# Altium PCB Stack PCB_Altium.pcbdoc
Units mm, origin at the board's own origin, x right, y up, seen from the top; angles counter-clockwise.
Board outline 151.01 x 116.33 mm, 2 copper layers (Top Layer, Bottom Layer); 39 components, 89 nets, 239 pads, 49 vias.
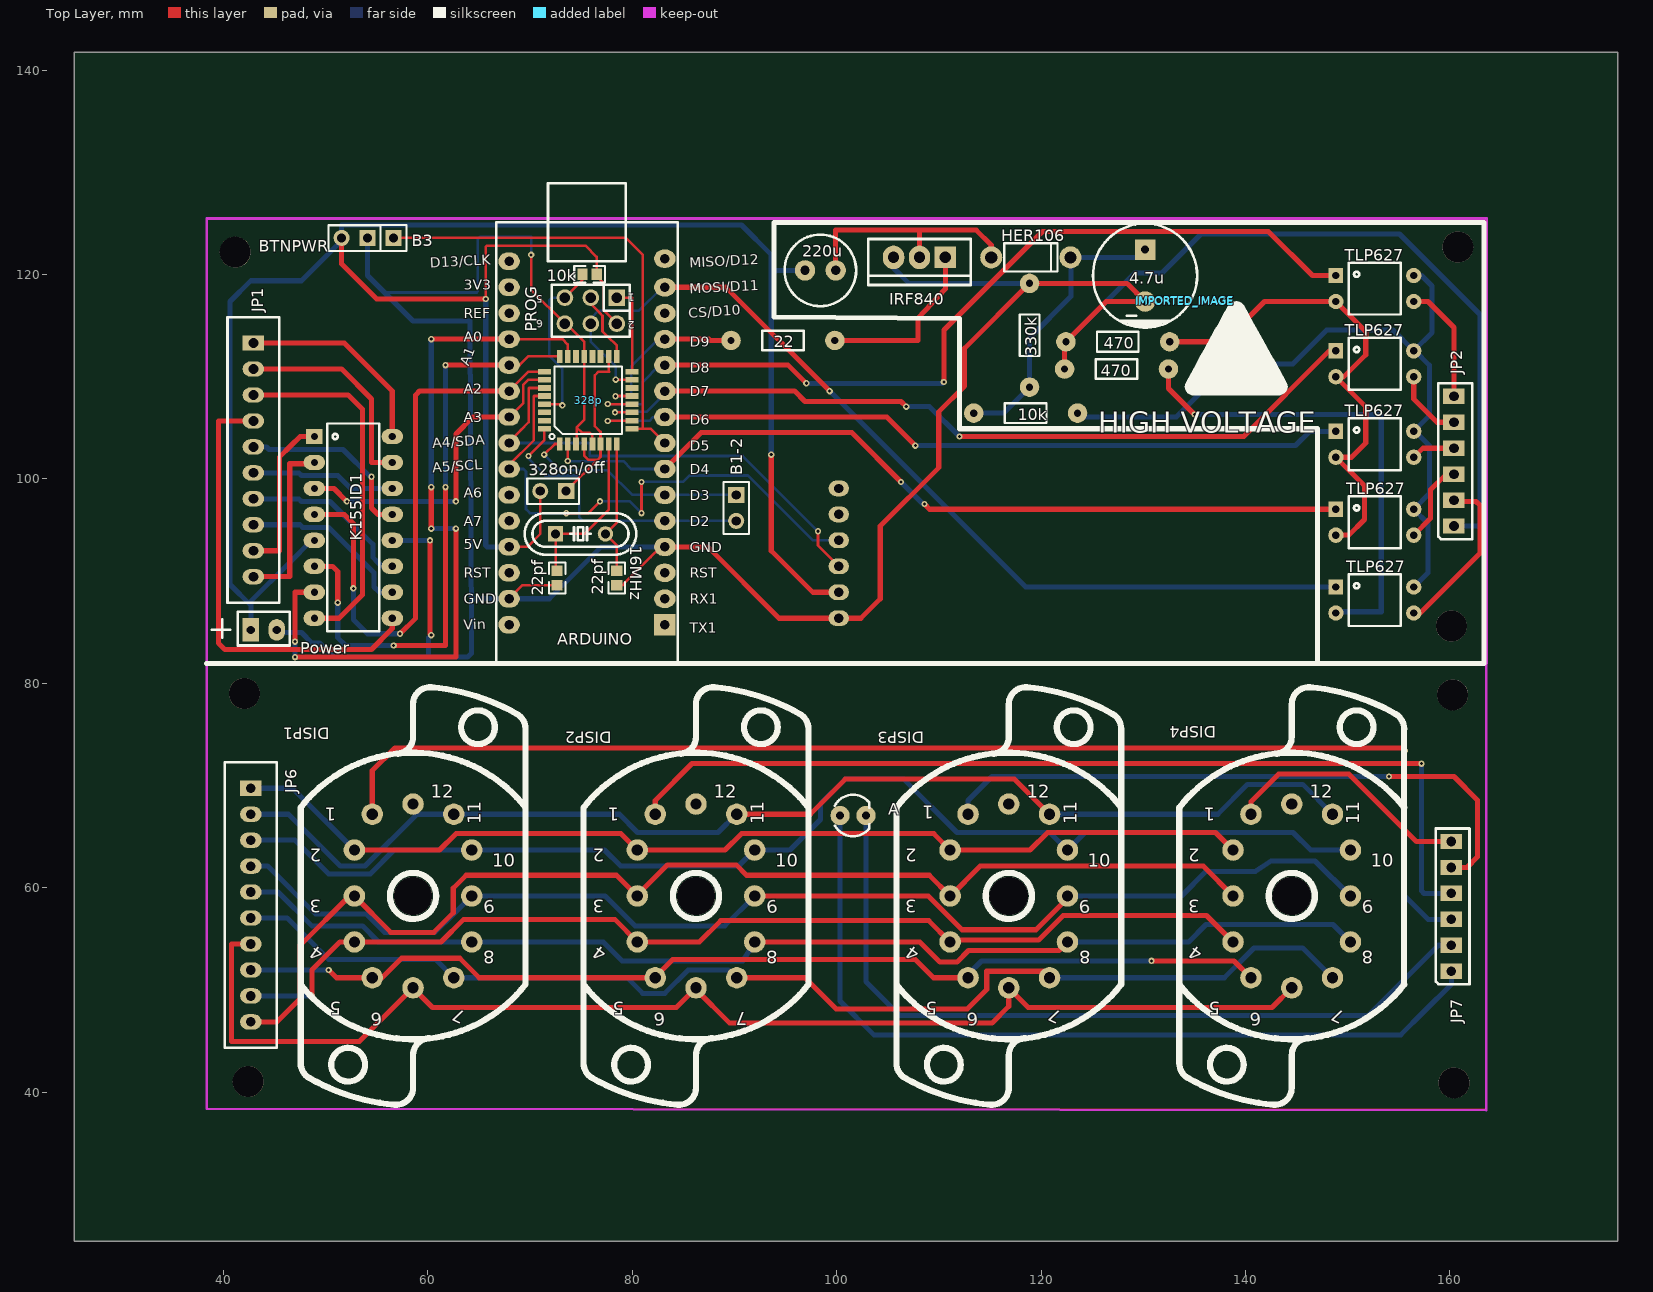
[diagram p0: Top Layer view]
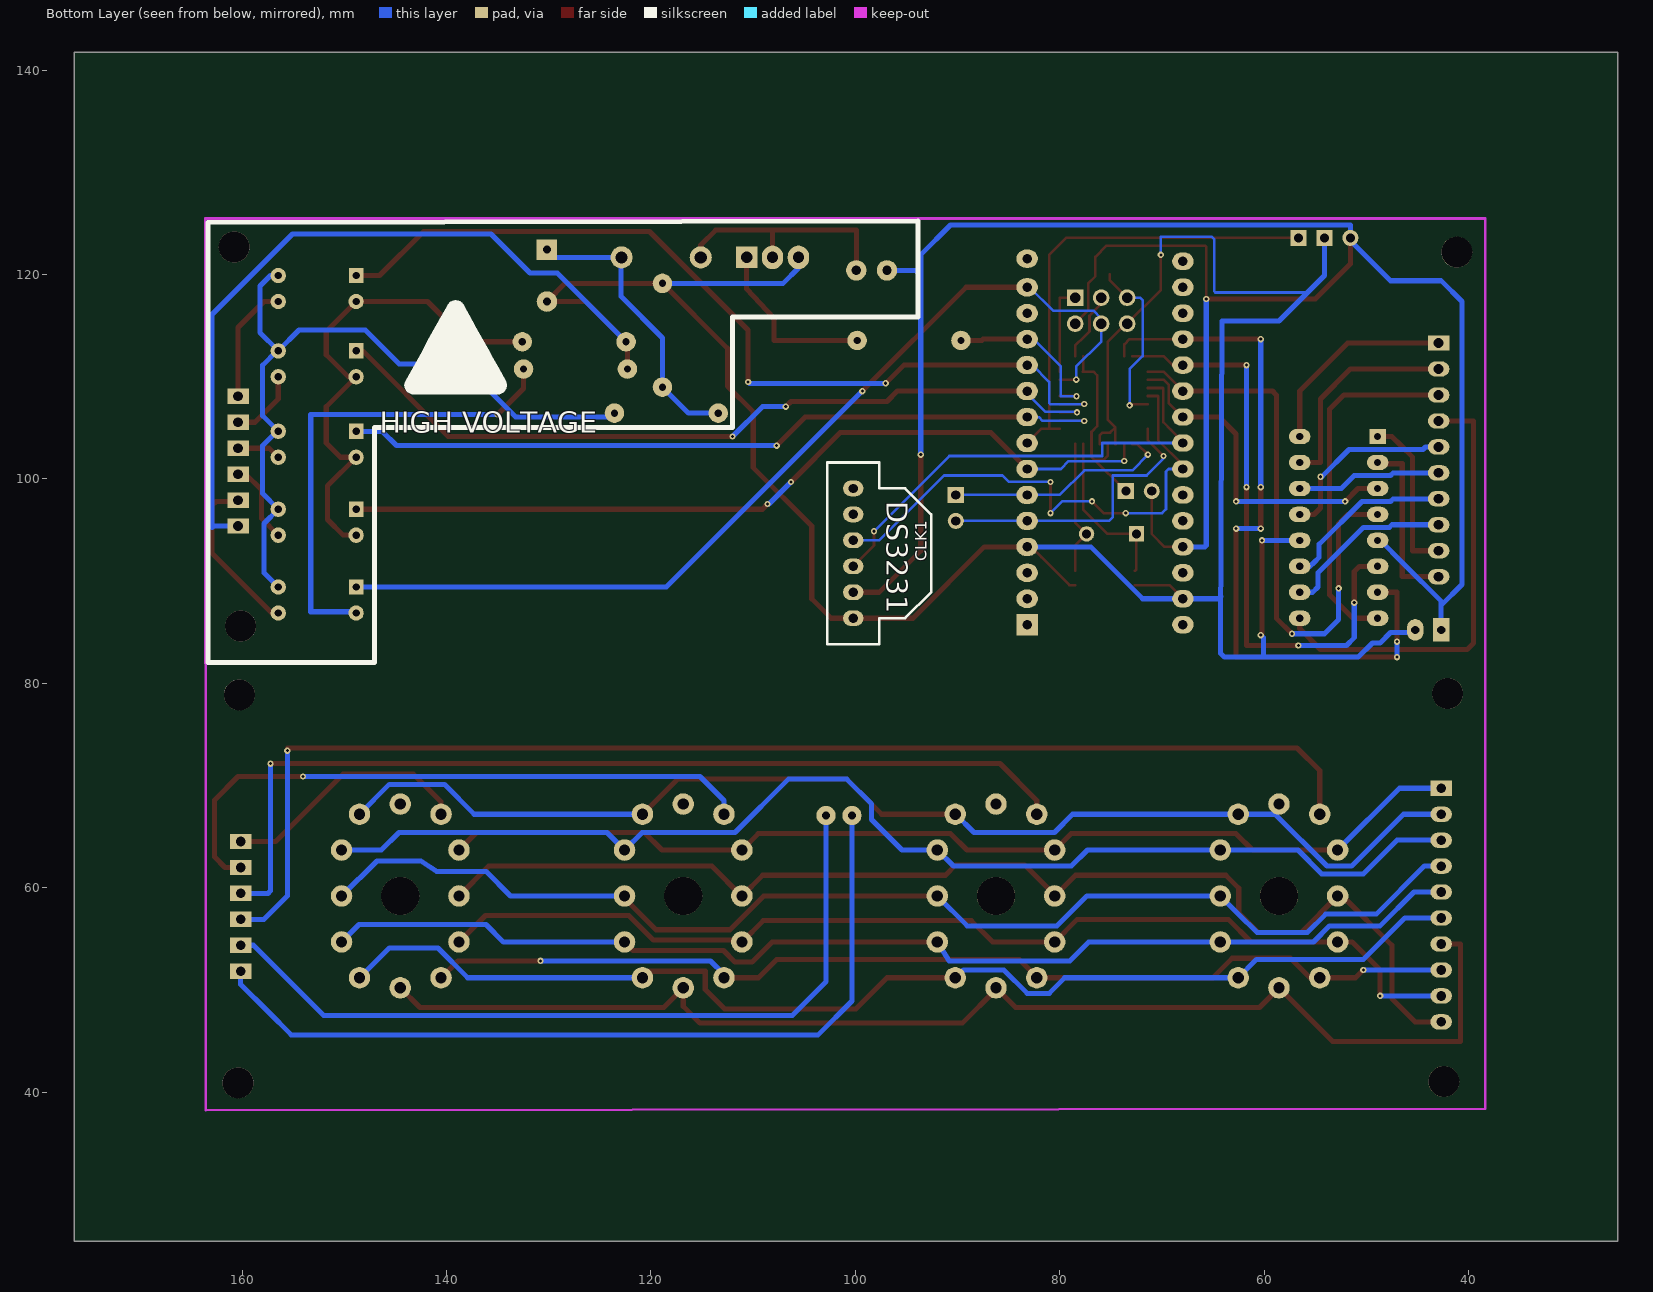
[diagram p1: Bottom Layer view, seen from below]

## Layer stack, top to bottom
Top Layer: signal copper (thickness not stored)
Dielectric: dielectric 0.32, FR-4, Dk 4.8
Bottom Layer: signal copper (thickness not stored)

## Board outline
176.414,25.4 25.4,25.4 25.4,141.732 176.414,141.732

## Components (designator, comment, footprint, x,y, rotation, side; value= is the part's Value field where it differs from the comment)
4.7u "4.7u 350В" CP_10X13MM 130.171,119.888 r180 top
10k "10k" RC06 118.487,106.426 r180 top
10k "10K" 0603 75.815,120.015 r0 top
16MHz "16MHz" HC-49S 74.926,94.615 r0 top
22 "22" RC06 94.738,113.538 r0 top
22pf "22pF" 0603 72.64,90.297 r90 top
22pf "22pF" 0603 78.482,90.297 r90 top
220u "220µ" RLB0712 96.897,120.396 r0 top
328on/off "ON/OFF micro" HDR-1X2/2.54 72.259,98.806 r180 top
328p "328p" TQFP32 75.688,107.696 r90 top
330k "330k" RC06 118.868,114.046 r270 top
470 "470" RC06 127.504,113.411 r0 top
470 "470" RC06 127.377,110.744 r0 top
A "Hologen" LED3MM 101.596,67.056 r0 top
ARDUINO "ARDUINO-NANO-V3.0" "ARDUINO_NANO V3" 75.561,103.505 r180 top
B1-2 "Signal 1-2" HDR-1X2/2.54 90.166,97.155 r270 top
B3 "Signal 3" HDR-1X1/2.54 56.638,123.571 r0 top
BTNPWR "BTN pwr" HDR-1X2/2.54 52.828,123.571 r180 top
CLK1 "DS3231" DS3231 100.199,93.98 r90 bottom
DISP1 "DISP_IN12A" DISP_IN-12_SOCKET_M 58.543,59.182 r0 top
DISP2 "DISP_IN12A" DISP_IN-12_SOCKET_M 86.229,59.182 r0 top
DISP3 "DISP_IN12A" DISP_IN-12_SOCKET_M 116.836,59.182 r0 top
DISP4 "DISP_IN12A" DISP_IN-12_SOCKET_M 144.522,59.182 r0 top
HER106 "HER106" DO-41 118.995,121.666 r0 top
IMPORTED_IMAGE "IMPORTED_IMAGE" IMPORTED_IMAGE 134.058,117.37 r0 top
IMPORTED_IMAGE "IMPORTED_IMAGE" IMPORTED_IMAGE 134.088,117.467 r0 top
IRF840 "IRF840" TO-220_MOD 108.327,121.412 r180 top
JP1 "10PIN" B10B_MOD 42.922,103.124 r90 top
JP2 "6PIN" 6PIN 160.397,101.727 r270 top
JP6 "10PIN" B10B_MOD 42.668,59.563 r90 top
JP7 "6PIN" 6PIN 160.143,58.166 r270 top
K155ID1 "К155ИД1" DIP16_MOD 48.891,104.14 r270 top
Power "Power" 2PIN_MOD 49.018,85.217 r0 top
PROG "PROG" HEADER_PRG_2X03 75.942,116.459 r180 top
TLP627 "TLP627" DIP4_MOD 148.84,119.888 r270 top
TLP627 "TLP627" DIP4_MOD 148.84,112.522 r270 top
TLP627 "TLP627" DIP4_MOD 148.84,104.648 r270 top
TLP627 "TLP627" DIP4_MOD 148.84,97.028 r270 top
TLP627 "TLP627" DIP4_MOD 148.84,89.408 r270 top

## Footprints (in the part's own frame and the unit in brackets; to place one, negate y for a bottom-side part, rotate by r counter-clockwise, add the part's x,y. Pads: shape width x height; smd on the part's side, far side on the other; paste and mask are expansions set on the pad)
2PIN_MOD [mm]
  rect 1.6x2.3 hole 0.798: 1(-6.35,0)
  oval 1.6x2.1 hole 0.798: 2(-3.81,0)
  silkscreen extent -10.16,-1.52 -2.54,1.78
6PIN [mm]
  rect 1.5x2.1 hole 0.95: 1(-6.35,0) 2(-3.81,0) 3(-1.27,0) 4(1.27,0) 5(3.81,0) 6(6.35,0)
  silkscreen extent -7.62,-1.52 7.62,1.78
0603 [mm]
  rect 1x1.1 smd: 1(-0.7,0) 2(0.7,0)
  silkscreen extent -1.5,-0.8 1.5,0.8
"ARDUINO_NANO V3" [mm]
  rect 2.1x2.1 hole 0.914: 1(-7.62,17.78)
  oval 2.1x1.778 hole 0.914: 2(-7.62,15.24) 3(-7.62,12.7) 4(-7.62,10.16) 5(-7.62,7.62) 6(-7.62,5.08) 7(-7.62,2.54) 8(-7.62,0) 9(-7.62,-2.54) 10(-7.62,-5.08) 11(-7.62,-7.62) 12(-7.62,-10.16) 13(-7.62,-12.7) 14(-7.62,-15.24) 15(-7.62,-18.034)
  oval 2.1x1.7 hole 0.914: 16(7.62,-17.78) 17(7.62,-15.24) 18(7.62,-12.7) 19(7.62,-10.16) 20(7.62,-7.62) 21(7.62,-5.08) 22(7.62,-2.54) 23(7.62,0) 24(7.62,2.54) 25(7.62,5.08) 26(7.62,7.62) 27(7.62,10.16) 28(7.62,12.7) 29(7.62,15.24) 30(7.62,17.78)
  silkscreen extent -8.89,-25.4 8.89,21.59
B10B_MOD [mm]
  rect 1.5x2.1 hole 0.95: 1(10.16,0)
  oval 1.5x2.1 hole 0.95: 2(7.62,0) 3(5.08,0) 4(2.54,0) 5(0,0) 6(-2.54,0) 7(-5.08,0) 8(-7.62,0) 9(-10.16,0) 10(-12.7,0)
  silkscreen extent -15.24,-2.54 12.7,2.54
CP_10X13MM [mm]
  rect 1.999x1.999 hole 0.803: 1(0.001,-2.541)
  round 1.999 hole 0.803: 2(0,2.54)
  silkscreen extent -5.1,-5.09 5.1,5.09
DIP4_MOD [mm]
  rect 1.5x1.397 hole 0.711: 1(0,0)
  round 1.5 hole 0.711: 2(2.54,0) 3(2.54,7.62) 4(0,7.62)
  silkscreen extent -1.27,1.27 3.81,6.35
DIP16_MOD [mm]
  rect 1.5x1.6 hole 0.701: 1(0,0)
  oval 1.5x2.1 hole 0.701: 2(2.54,0) 3(5.08,0) 4(7.62,0) 5(10.16,0) 6(12.7,0) 7(15.24,0) 8(17.78,0) 9(17.78,7.62) 10(15.24,7.62) 11(12.7,7.62) 12(10.16,7.62) 13(7.62,7.62) 14(5.08,7.62) 15(2.54,7.62) 16(0,7.62)
  silkscreen extent -1.27,1.27 19.05,6.35
DISP_IN-12_SOCKET_M [mm]
  round 2.1 hole 1.1: 1(-3.988,8.001) 2(-5.74,4.496) 3(-5.74,0) 4(-5.74,-4.496) 5(-3.988,-8.001) 6(0,-8.992) 7(3.988,-8.001) 8(5.74,-4.496) 9(5.74,0) 10(5.74,4.496) 11(3.988,8.001) 12(0,8.992)
  silkscreen extent -11,-20.43 11,20.43
DO-41 [mil]
  round 85 hole 47.24: 1(-152.5,0) 2(152.5,0)
  silkscreen extent -102,-54 102,54
DS3231 [mm]
  oval 1.52x2 hole 0.914: 1(-7.62,0)
  oval 1.524x2 hole 0.914: 2(-5.08,0) 3(-2.54,0)
  oval 1.54x2 hole 0.914: 4(0,0) 5(2.54,0) 6(5.08,0)
  silkscreen extent -10.16,-7.62 7.62,2.54
HC-49S [mm]
  rect 1.5x1.5 hole 0.9: 1(-2.438,0)
  round 1.5 hole 0.9: 2(2.438,0)
  silkscreen extent -5.46,-2.03 5.46,2.03
HDR-1X1/2.54 [mil]
  rect 62x62 hole 35: 1(0,0)
  silkscreen extent -50,-50 50,50
HDR-1X2/2.54 [mil]
  rect 62x62 hole 35: 1(-50,0)
  round 62 hole 35: 2(50,0)
  silkscreen extent -100,-49 100,50
HEADER_PRG_2X03 [mm]
  rect 1.633x1.633 hole 1.021: 1(-2.541,-1.269)
  round 1.633 hole 1.021: 2(-2.54,1.27) 3(0,-1.27) 4(0,1.27) 5(2.54,-1.27) 6(2.54,1.27)
  silkscreen extent -3.81,-2.54 3.81,2.54
IMPORTED_IMAGE [mm]
  silkscreen extent 0,-9.2 10.05,0
LED3MM [mil]
  round 74 hole 32: 1(-50,0) 2(50,0)
  silkscreen extent -71,-80 62,80
RC06 [mil]
  round 75 hole 28: 1(-200,0) 2(200,0)
  silkscreen extent -80,-38 80,38
RLB0712 [mm]
  round 2 hole 0.914: 1(0,0) 2(3,0)
  silkscreen extent -2,-3.5 5,3.5
TO-220_MOD [mil]
  rect 82.68x82.68 hole 44: 1(-91,-10)
  oval 82.68x90.55 hole 44: 2(9,-10) 3(109,-10)
  silkscreen extent -188,-81 206,96
TQFP32 [mil]
  rect 50x22 smd: 1(-169,110) 2(-169,79) 3(-169,47) 4(-169,16) 5(-169,-16) 6(-169,-47) 7(-169,-79) 8(-169,-110) 17(169,-110) 18(169,-79) 19(169,-47) 20(169,-16) 21(169,16) 22(169,47) 23(169,79) 24(169,110)
  rect 22x50 smd: 9(-110,-169) 10(-79,-169) 11(-47,-169) 12(-16,-169) 13(16,-169) 14(47,-169) 15(79,-169) 16(110,-169) 25(110,169) 26(79,169) 27(47,169) 28(16,169) 29(-16,169) 30(-47,169) 31(-79,169) 32(-110,169)
  silkscreen extent -150,-130 130,150

## Free pads (board coordinates)
  round 3.032 hole 3.032 unplated: ""(41.144,122.174) ""(42.033,78.994) ""(42.414,41.021) ""(160.143,85.598) ""(160.27,78.867) ""(160.397,40.894) ""(160.778,122.682)
  round 3.732 hole 3.732 unplated: ""(58.543,59.182) ""(86.229,59.182) ""(116.836,59.182) ""(144.522,59.182)

## Via types
v1: diameter 0.62, hole 0.305, Top Layer to Bottom Layer, 46 vias
v2: diameter 0.61, hole 0.305, Top Layer to Bottom Layer, 3 vias

## Nets (pads, with @x,y where several pads share a name; then routed paths per layer and width w, separated by ;. In a path a pad name is that pad's centre, name@x,y a point inside that pad or via, vN(x,y) a via of type N, cw(c..) or ccw(c..) an arc to the next point about the centre after c; other vN are vias at no path point)
+5V: 10k.2@76.515,120.015 220u.1 328on/off.2 ARDUINO.27 BTNPWR.2 CLK1.2 K155ID1.5 Power.1 PROG.2 | length 219.5
  Top Layer w0.254: v1(65.655,117.602) 65.655,122.682 65.782,122.809 75.434,122.809 76.515,121.728 76.515,120.015 76.515,119.823 77.212,119.126 77.212,116.459 PROG.2 ; ARDUINO.27 69.465,93.345 69.719,93.345 70.989,94.615 328on/off.2
  Top Layer w0.5: BTNPWR.2 51.558,121.031 54.987,117.602 v1(65.655,117.602) ; v2(93.595,102.362) 93.595,92.964 97.659,88.9 CLK1.2
  Bottom Layer w0.5: K155ID1.5 48.637,93.98 46.351,91.694 42.668,88.011 Power.1 42.668,87.63 40.636,89.662 40.636,113.792 40.636,117.348 42.668,119.38 47.621,119.38 49.653,121.412 51.558,123.317 BTNPWR.2 51.558,124.841 90.674,124.841 93.595,121.92 v2(93.595,102.362) ; v1(65.655,117.602) 65.655,93.472 65.782,93.345 ARDUINO.27 ; 93.595,119.93 94.061,120.396 220u.1
B0: 328p.23 ARDUINO.19 K155ID1.7 | length 72.3
  Top Layer w0.254: ARDUINO.19 73.148,113.665 73.656,113.157 73.681,113.132 328p.23
  Top Layer w0.5: v1(46.986,82.55) 62.734,82.55 v1(62.734,95.123) ; v1(46.986,84.074) 46.989,86.042 46.986,88.9 K155ID1.7 ; v1(60.321,95.123) v1(60.321,99.187) ; v1(60.321,113.665) ARDUINO.19
  Bottom Layer w0.5: v1(46.986,82.55) v1(46.986,84.074) ; v1(60.321,95.123) v1(62.734,95.123) ; v1(60.321,99.187) v1(60.321,113.665)
B1: 328p.24 ARDUINO.20 K155ID1.6 | length 58.8
  Top Layer w0.254: ARDUINO.20 68.957,111.125 69.846,112.014 69.871,111.989 328p.24
  Top Layer w0.5: K155ID1.6 50.669,91.44 51.177,90.932 v1(51.177,87.884) ; v1(56.638,83.693) 61.718,83.693 61.718,86.868 v1(61.718,99.187) ; v1(61.718,111.125) ARDUINO.20
  Bottom Layer w0.5: v1(51.177,87.884) 51.177,84.455 51.939,83.693 v1(56.638,83.693) ; v1(61.718,99.187) v1(61.718,111.125)
B2: 328p.25 ARDUINO.21 K155ID1.4 | length 56.3
  Top Layer w0.254: ARDUINO.21 69.846,110.49 328p.25
  Top Layer w0.5: K155ID1.4 51.812,96.52 52.701,95.631 v1(52.701,89.281) ; v1(57.273,84.836) 58.797,86.36 58.797,88.265 58.797,108.204 59.178,108.585 ARDUINO.21
  Bottom Layer w0.5: v1(52.701,89.281) 52.701,86.233 54.098,84.836 v1(57.273,84.836)
B3: 328p.26 ARDUINO.22 K155ID1.3 | length 32.9
  Top Layer w0.254: ARDUINO.22 69.338,107.442 69.338,109.22 69.719,109.601 69.821,109.703 328p.26
  Top Layer w0.5: K155ID1.3 50.796,99.06 v1(52.066,97.79) ; v1(62.734,97.79) 62.734,104.394 64.385,106.045 ARDUINO.22
  Bottom Layer w0.5: v1(52.066,97.79) v1(62.734,97.79)
CLOCK1_3: 328p.27 ARDUINO.23 CLK1.3 | length 46.5
  Top Layer w0.254: ARDUINO.23 67.941,103.632 69.084,104.775 69.846,105.537 69.846,108.839 69.897,108.89 328p.27 ; v2(98.167,94.869) 98.167,93.472 CLK1.3
  Bottom Layer w0.254: ARDUINO.23 75.815,103.505 75.815,102.235 85.086,102.235 90.801,102.235 v2(98.167,94.869)
CLOCK1_4: 328p.28 ARDUINO.24 CLK1.4 | length 52.4
  Top Layer w0.254: ARDUINO.24 67.941,101.346 70.354,103.759 70.354,108.077 70.379,108.102 328p.28 ; v1(73.529,96.647) 75.688,96.647 v1(76.831,97.79) ; v1(80.895,96.647) v1(80.895,99.695)
  Bottom Layer w0.254: ARDUINO.24 69.338,100.965 69.592,100.711 69.592,97.028 69.973,96.647 v1@73.656,96.647 ; v1(76.831,97.79) 79.752,97.79 v1(80.895,96.647) ; v1(80.895,99.695) 84.959,99.695 85.594,100.33 91.309,100.33 97.659,93.98 CLK1.4
CLOCK1_5: CLK1.5
CLOCK1_6: CLK1.6
DISP1_1: DISP1.1 JP7.4 | length 126.2
  Top Layer w0.5: DISP1.1 54.555,71.45 56.765,73.66 155.571,73.66 v1(155.571,73.406)
  Bottom Layer w0.5: v1(155.571,73.406) 155.571,59.182 157.857,56.896 JP7.4
DISP1_2: DISP1.2 DISP2.2 DISP3.2 DISP4.2 JP6.1 | length 102.7
  Top Layer w0.5: DISP1.2 61.134,63.678 62.734,65.278 78.888,65.278 DISP2.2 89.074,63.678 90.674,65.278 109.495,65.278 DISP3.2 118.919,63.678 120.646,65.405 137.054,65.405 DISP4.2
  Bottom Layer w0.5: JP6.1 46.758,69.723 DISP1.2
DISP1_3: DISP1.3 DISP2.3 DISP3.3 DISP4.3 JP6.10 | length 115.3
  Top Layer w0.5: JP6.10 45.208,46.863 47.494,49.149 47.494,54.356 52.32,59.182 DISP1.3 56.359,55.626 60.575,55.626 62.48,57.531 62.48,59.944 63.75,61.214 78.457,61.214 DISP2.3 80.489,59.284 83.435,62.23 90.166,62.23 91.182,61.214 109.064,61.214 DISP3.3 111.121,59.182 114.042,62.103 135.861,62.103 DISP4.3
DISP1_4: DISP1.4 DISP2.4 DISP3.4 DISP4.4 JP6.9 | length 105.5
  Top Layer w0.5: v1(48.637,49.403) 48.637,51.943 51.38,54.686 DISP1.4 61.286,54.686 63.496,56.896 78.279,56.896 DISP2.4 86.559,54.686 88.642,56.769 109.013,56.769 DISP3.4 111.705,54.686 111.883,54.864 113.153,54.864 119.757,54.864 122.17,57.277 136.191,57.277 DISP4.4
  Bottom Layer w0.5: JP6.9 v1(48.637,49.403)
DISP1_5: DISP1.5 DISP2.5 DISP3.5 DISP4.5 JP6.8 | length 102.8
  Top Layer w0.5: v1(50.288,51.943) 51.05,51.181 DISP1.5 55.495,51.181 57.4,53.086 63.115,53.086 65.02,51.181 DISP2.5 82.241,51.257 83.943,52.959 107.692,52.959 109.47,51.181 DISP3.5 ; v1(130.806,52.832) 138.883,52.832 DISP4.5
  Bottom Layer w0.5: JP6.8 45.315,51.943 v1(50.288,51.943) ; DISP3.5 112.848,51.511 114.169,52.832 122.805,52.832 v1(130.806,52.832)
DISP1_6: DISP1.6 DISP2.6 DISP3.6 DISP4.6 JP6.7 | length 124.6
  Top Layer w0.5: JP6.7 40.763,54.483 40.763,44.958 53.311,44.958 DISP1.6 58.543,50.165 60.448,48.26 84.299,48.26 DISP2.6 86.229,50.038 89.531,46.736 114.296,46.736 115.185,46.736 116.836,48.387 DISP3.6 116.836,50.165 118.741,48.26 132.076,48.26 142.592,48.26 DISP4.6
DISP1_7: DISP1.7 DISP2.7 DISP3.7 DISP4.7 JP6.6 | length 116.7
  Top Layer w0.5: DISP2.7 96.897,51.181 99.945,48.133 112.772,48.133 114.677,50.038 114.677,51.816 120.189,51.816 DISP3.7
  Bottom Layer w0.5: JP6.6 46.224,57.023 50.288,52.959 60.753,52.959 DISP1.7 79.498,51.181 81.022,49.657 83.181,49.657 85.467,51.943 89.404,51.943 90.166,51.181 DISP2.7 ; DISP3.7 137.918,51.181 140.839,54.102 145.589,54.102 DISP4.7
DISP1_8: DISP1.8 DISP2.8 DISP3.8 DISP4.8 JP6.5 | length 114.5
  Top Layer w0.5: DISP2.8 108.124,54.686 110.105,52.705 111.756,52.705 112.899,53.848 121.738,53.848 DISP3.8
  Bottom Layer w0.5: JP6.5 45.335,59.563 48.637,56.261 53.59,56.261 55.165,54.686 DISP1.8 77.161,54.686 78.99,52.832 86.61,52.832 90.801,52.832 DISP2.8 ; DISP3.8 134.438,54.686 136.14,56.388 148.561,56.388 DISP4.8
DISP1_9: DISP1.9 DISP2.9 DISP3.9 DISP4.9 JP6.4 | length 119.8
  Top Layer w0.5: DISP2.9 108.962,59.182 112.264,55.88 119.503,55.88 120.773,57.15 120.989,57.366 122.576,58.953 DISP3.9
  Bottom Layer w0.5: JP6.4 44.319,62.103 49.018,57.404 53.971,57.404 55.749,55.626 60.702,55.626 62.505,57.404 DISP1.9 77.339,59.182 80.26,56.261 89.048,56.261 DISP2.9 ; DISP3.9 133.727,59.182 136.14,61.595 140.966,61.595 142.49,62.611 146.808,62.611 DISP4.9
DISP1_10: DISP1.10 DISP2.10 DISP3.10 DISP4.10 JP6.3 | length 119.3
  Bottom Layer w0.5: JP6.3 46.986,64.643 50.288,61.341 54.352,61.341 56.689,63.678 DISP1.10 77.288,63.678 78.863,62.103 90.395,62.103 DISP2.10 95.424,63.678 98.421,66.675 98.421,68.199 100.834,70.612 106.549,70.612 111.756,65.405 120.849,65.405 DISP3.10 124.304,65.405 144.649,65.405 146.376,63.678 DISP4.10
DISP1_11: DISP1.11 DISP2.11 DISP3.11 DISP4.11 JP6.2 | length 116.8
  Top Layer w0.5: DISP2.11 97.405,67.183 100.834,70.612 117.395,70.612 DISP3.11
  Bottom Layer w0.5: JP6.2 46.351,67.183 51.431,62.103 53.844,62.103 58.924,67.183 DISP1.11 71.85,67.183 78.736,67.183 80.514,65.405 81.53,65.405 88.388,65.405 90.166,67.183 DISP2.11 ; DISP3.11 137.283,67.183 140.204,70.104 145.589,70.104 DISP4.11
DISP2_1: DISP2.1 JP7.3 | length 93.3
  Top Layer w0.5: DISP2.1 82.241,68.529 85.848,72.136 v1(157.222,72.136)
  Bottom Layer w0.5: v1(157.222,72.136) 157.222,59.69 157.476,59.436 JP7.3
DISP3_1: DISP3.1 JP7.2 | length 61.6
  Top Layer w0.5: v1(154.047,70.866) 160.397,70.866 162.683,68.58 162.683,62.992 161.667,61.976 JP7.2
  Bottom Layer w0.5: DISP3.1 112.848,68.529 115.185,70.866 v1(154.047,70.866)
DISP4_1: DISP4.1 JP7.1 | length 24.7
  Top Layer w0.5: DISP4.1 140.534,68.402 143.252,71.12 150.11,71.12 156.714,64.516 JP7.1
GND: 4.7u.2 22pf.1 328p.3 328p.5 328p.21 330k.1 470.1 ARDUINO.4 ARDUINO.29 BTNPWR.1 CLK1.1 IRF840.3 JP2.6 K155ID1.12 Power.2 PROG.6 | length 333.8
  Top Layer w0.254: ARDUINO.29 69.273,89.597 22pf.1@72.64,89.597 ; v1(70.1,121.92) 70.1,118.491 PROG.6 73.529,115.189 75.307,113.411 75.282,113.386 328p.21 75.282,105.766 74.545,105.029 ; 328p.3 74.545,103.403 74.545,105.029 ; 328p.5 76.094,104.242 75.815,104.521 75.053,104.521 74.545,105.029 ; 22pf.1@78.482,89.597 79.052,89.597 81.784,92.329 82.8,93.345 ARDUINO.4
  Top Layer w0.5: v1(60.194,93.98) 60.194,84.836 v1(60.321,84.709) ; ARDUINO.4 87.372,93.345 94.357,86.36 CLK1.1 102.358,86.36 104.263,88.265 104.263,95.377 109.978,101.092 109.978,106.553 112.518,109.093 112.518,112.776 330k.1 128.393,119.126 4.7u.2 126.361,117.348 122.424,113.411 122.297,113.284 470.1@122.297,110.744
  Bottom Layer w0.254: 55.754,118.232 55.759,118.237 64.766,118.237 64.893,118.364 64.893,123.444 65.147,123.698 70.1,123.698 v1(70.1,121.92)
  Bottom Layer w0.5: Power.2 45.462,84.963 47.621,84.963 48.637,83.947 49.399,83.947 50.796,82.55 60.067,82.55 ; BTNPWR.1 54.098,119.888 58.543,115.443 64.131,115.443 64.258,84.201 64.258,82.931 63.877,82.55 60.067,82.55 ; K155ID1.12 v1(60.194,93.98) ; v1(60.321,84.709) 60.067,84.455 60.067,82.55 ; 64.241,88.486 64.461,88.265 ARDUINO.29 71.624,88.265 71.878,88.265 76.958,93.345 ARDUINO.4 ; IRF840.3 105.558,120.625 107.057,119.126 330k.1 ; 470.1@122.424,113.411 129.155,120.142 131.822,120.142 135.632,123.952 155.063,123.952 162.937,116.078 162.937,95.25 162.81,95.377 JP2.6
JP1_1: JP1.1 K155ID1.16 | length 20
  Top Layer w0.5: JP1.1 51.813,113.283 56.511,108.585 K155ID1.16
JP1_2: JP1.2 K155ID1.15 | length 21
  Top Layer w0.5: JP1.2 51.558,110.744 54.479,107.823 54.479,101.6 K155ID1.15
JP1_3: JP1.3 K155ID1.8 | length 35.1
  Top Layer w0.5: JP1.3 52.193,108.204 53.59,106.807 53.59,88.646 51.304,86.36 K155ID1.8
JP1_4: JP1.4 K155ID1.9 | length 44.3
  Top Layer w0.5: JP1.4 39.493,105.664 39.493,88.519 39.493,83.947 40.128,83.312 54.479,83.312 56.511,85.344 K155ID1.9
JP1_5: JP1.5 K155ID1.13 | length 18.1
  Top Layer w0.5: v1(54.479,100.203) 54.479,97.155 55.114,96.52 K155ID1.13
  Bottom Layer w0.5: JP1.5 44.192,103.124 44.446,102.87 51.685,102.87 54.352,100.203 v1(54.479,100.203)
JP1_6: JP1.6 K155ID1.14 | length 14.2
  Bottom Layer w0.5: JP1.6 47.367,100.584 47.621,100.33 51.177,100.33 52.447,99.06 K155ID1.14
JP1_7: JP1.7 K155ID1.11 | length 17.1
  Bottom Layer w0.5: JP1.7 47.367,98.044 47.621,97.79 50.161,97.79 50.415,97.79 54.606,93.599 54.606,92.329 55.114,91.821 55.495,91.44 K155ID1.11
JP1_8: JP1.8 K155ID1.10 | length 17.1
  Bottom Layer w0.5: JP1.8 47.494,95.504 47.748,95.25 50.288,95.25 54.733,90.805 54.733,89.408 55.241,88.9 K155ID1.10
JP1_9: JP1.9 K155ID1.1 | length 16
  Top Layer w0.5: JP1.9 45.462,92.964 45.462,102.108 46.605,103.251 47.494,104.14 K155ID1.1
JP1_10: JP1.10 K155ID1.2 | length 17.1
  Top Layer w0.5: JP1.10 46.478,90.424 46.478,101.473 48.764,101.473 K155ID1.2
JP2_5: JP2.5 TLP627.3@156.46,86.868 | length 16.3
  Top Layer w0.5: TLP627.3@156.46,86.868 157.095,86.868 162.937,92.71 162.937,97.409 162.556,97.79 160.524,97.79 JP2.5
JP7_5: A.2 JP7.5 | length 78
  Bottom Layer w0.5: A.2@102.866,67.31 102.866,50.8 106.168,47.498 152.015,47.498 158.873,54.356 JP7.5
JP7_6: A.1 JP7.6 | length 82.9
  Bottom Layer w0.5: A.1@100.326,67.31 100.326,58.674 100.326,50.8 100.326,48.895 103.628,45.593 155.19,45.593 157.476,47.879 160.143,50.546 JP7.6
L1_2: 220u.2 HER106.1 IRF840.2 | length 23.7
  Top Layer w0.5: 220u.2 99.897,124.333 108.073,124.333 ; IRF840.2 108.098,124.308 108.073,124.333 ; HER106.1 115.121,122.872 113.661,124.333 108.073,124.333
Q1_1: 22.2 IRF840.1 | length 17.3
  Top Layer w0.5: 22.2 107.946,113.538 107.946,115.697 110.638,118.593 IRF840.1
S$67: 
S$69: 
S$3081: 
S$3122: 
S$3124: 
S$3127: 
S$3223: 
S$3225: 
S$3228: 
U1_1: ARDUINO.1
U1_2: ARDUINO.2
U1_3: ARDUINO.3
U1_5: 328p.32 ARDUINO.5 B1-2.2 | length 28.8
  Top Layer w0.254: v1(69.846,102.235) 71.395,103.784 328p.32
  Bottom Layer w0.254: v1(69.846,102.235) 69.846,101.981 71.497,100.33 74.799,100.33 74.799,96.266 75.18,95.885 ARDUINO.5 B1-2.2
U1_6: 328p.1 ARDUINO.6 B1-2.1 | length 22.4
  Top Layer w0.254: v1(71.37,102.362) 72.411,103.403 328p.1
  Bottom Layer w0.254: v1(71.37,102.362) 72.894,100.838 77.593,100.838 80.006,98.425 ARDUINO.6 B1-2.1
U1_7: 328p.2 ARDUINO.7 TLP627.1@148.84,97.028 | length 81.7
  Top Layer w0.254: v1@73.656,101.727 v1(73.681,101.752) 328p.2
  Top Layer w0.5: ARDUINO.7 86.737,104.521 101.469,104.521 v1(106.295,99.695) ; v1(108.581,97.536) 109.088,97.029 TLP627.1@148.84,97.029
  Bottom Layer w0.254: v1(73.681,101.752) 73.707,101.727 79.117,101.727 79.879,100.965 ARDUINO.7
  Bottom Layer w0.5: v1(106.295,99.695) 108.454,97.536 v1(108.581,97.536)
U1_8: 328p.9 ARDUINO.8 B3.1 | length 45.7
  Top Layer w0.254: B3.1@56.765,123.571 79.371,123.571 81.022,121.92 81.022,104.902 ; 328p.9 81.784,104.902 ARDUINO.8
U1_9: 328p.10 ARDUINO.9 TLP627.1@148.84,104.648 | length 75.5
  Top Layer w0.254: v1(77.593,105.664) 77.618,105.689 328p.10
  Top Layer w0.5: ARDUINO.9 104.898,106.045 v1(107.692,103.251)
  Bottom Layer w0.254: v1(77.593,105.664) 81.657,105.664 82.038,106.045 ARDUINO.9
  Bottom Layer w0.5: v1(107.692,103.251) 144.903,103.251 146.3,104.648 TLP627.1@148.84,104.649
U1_10: 328p.11 ARDUINO.10 TLP627.1@148.84,112.522 | length 78.6
  Top Layer w0.254: v1@78.228,106.426 v1(78.304,106.502) 328p.11
  Top Layer w0.5: ARDUINO.10 95.881,108.585 96.897,107.569 106.295,107.569 v1(106.803,107.061) ; v1(112.01,104.14) 139.823,104.14 148.205,112.522 TLP627.1@148.84,112.522
  Bottom Layer w0.254: v1(78.304,106.502) 78.355,106.553 81.403,106.553 83.181,108.331 ARDUINO.10
  Bottom Layer w0.5: v1(106.803,107.061) 109.089,107.061 v1(112.01,104.14)
U1_11: 328p.12 ARDUINO.11 TLP627.1@148.84,119.888 | length 88.2
  Top Layer w0.254: v1(77.593,107.315) 77.618,107.29 328p.12
  Top Layer w0.5: ARDUINO.11 95.246,111.125 v1(97.024,109.347) ; v1(110.486,109.474) 110.486,114.554 117.725,121.793 120.138,124.206 142.236,124.206 146.554,119.888 TLP627.1@148.84,119.888
  Bottom Layer w0.254: v1@77.466,107.315 80.895,107.315 81.022,107.442 81.022,109.474 82.673,111.125 ARDUINO.11
  Bottom Layer w0.5: v1(97.024,109.347) 101.723,109.347 110.359,109.347 v1(110.486,109.474)
U1_12: 22.1 328p.13 ARDUINO.12 | length 17
  Top Layer w0.254: v1(78.355,108.077) 78.38,108.102 328p.13
  Top Layer w0.5: ARDUINO.12 87.499,113.665 87.626,113.538 22.1
  Bottom Layer w0.254: v1(78.355,108.077) 79.879,108.077 79.879,110.998 82.546,113.665 ARDUINO.12
U1_13: ARDUINO.13
U1_14: 328p.15 ARDUINO.14 PROG.4 TLP627.1@148.84,89.408 | length 94.9
  Top Layer w0.254: v1(78.38,109.703) 328p.15
  Top Layer w0.5: ARDUINO.14 89.15,118.745 v1(99.31,108.585)
  Bottom Layer w0.254: v1(78.38,109.703) 78.38,110.973 75.942,113.411 PROG.4 75.942,115.697 76.704,116.459 80.641,116.459 82.927,118.745 ARDUINO.14
  Bottom Layer w0.5: v1(99.31,108.585) 118.486,89.409 TLP627.1@148.84,89.409
U1_15: ARDUINO.15
U1_16: ARDUINO.16
U1_17: ARDUINO.17
U1_18: ARDUINO.18
U1_25: ARDUINO.25
U1_26: ARDUINO.26
U1_28: ARDUINO.28
U1_30: ARDUINO.30
U2_2: 470.2@132.584,113.411 TLP627.2@148.84,94.488 TLP627.2@148.84,102.108 TLP627.2@148.84,109.982 TLP627.2@148.84,117.348 | length 50
  Top Layer w0.5: 470.2@132.584,113.411 137.918,113.411 141.855,117.348 148.84,117.348 151.761,114.427 151.761,112.141 149.602,109.982 148.84,109.982 151.761,107.061 151.761,103.505 150.364,102.108 148.84,102.108 151.634,99.314 151.634,96.012 150.11,94.488 TLP627.2@148.84,94.488
U2_3: JP2.1 TLP627.3@156.46,117.348 | length 11.7
  Top Layer w0.5: TLP627.3@156.46,117.348 157.857,117.348 160.397,114.808 JP2.1
U2_4: 10k.1@123.567,106.426 TLP627.4 | length 73.6
  Bottom Layer w0.5: 10k.1@123.567,106.426 123.948,106.045 133.219,106.045 137.537,110.363 138.426,111.252 144.649,111.252 147.951,114.554 154.428,114.554 TLP627.4@156.46,112.522 ; TLP627.4@156.46,89.408 157.857,90.805 157.857,95.631 156.46,97.028 157.984,98.552 157.984,103.251 156.587,104.648 156.46,104.648 157.984,106.172 157.984,111.125 156.587,112.522 TLP627.4@156.46,112.522 ; TLP627.4@156.46,119.888 157.222,119.888 158.238,118.872 158.238,114.3 TLP627.4@156.46,112.522
U3_3: JP2.2 TLP627.3@156.46,109.982 | length 7
  Top Layer w0.5: TLP627.3@156.46,109.982 156.46,107.823 158.111,106.172 158.745,105.538 JP2.2
U4_3: JP2.3 TLP627.3@156.46,102.108 | length 4.3
  Top Layer w0.5: TLP627.3@156.46,102.108 157.35,102.998 JP2.3
U5_3: JP2.4 TLP627.3@156.46,94.488 | length 8
  Top Layer w0.5: TLP627.3@156.46,94.488 158.111,96.139 158.111,98.933 159.636,100.458 JP2.4
U6_2: 470.2@132.457,110.744 TLP627.2@148.84,86.868 | length 47.6
  Top Layer w0.5: 470.2@132.457,110.744 132.457,108.839 v2(134.997,106.299)
  Bottom Layer w0.5: v2(134.997,106.299) 153.285,106.299 153.285,86.995 148.967,86.995 TLP627.2@148.84,86.868
U7_4: 328on/off.1 328p.4 328p.6 328p.18 | length 18.6
  Top Layer w0.254: 328on/off.1 76.831,102.108 76.882,102.159 328p.6 76.882,104.597 76.831,104.648 76.323,105.156 76.323,110.109 76.704,110.49 77.72,110.49 77.695,110.515 328p.18 ; 328p.4 75.282,102.26 75.688,101.854 76.577,101.854
U7_7: 16MHz.1 22pf.2@72.64,90.997 328p.7 | length 16.3
  Top Layer w0.254: 22pf.2@72.64,90.997 72.488,91.149 16MHz.1 75.307,94.615 77.695,97.003 328p.7
U7_8: 16MHz.2 22pf.2@78.482,90.997 328p.8 | length 13.3
  Top Layer w0.254: 22pf.2@78.482,90.997 78.482,93.497 16MHz.2 78.482,95.733 328p.8
U7_14: 328p.14
U7_16: 328p.16 PROG.1 | length 8.8
  Top Layer w0.254: PROG.1@78.482,117.729 80.006,117.729 79.981,117.704 328p.16
U7_17: 328p.17 PROG.3 | length 6.8
  Top Layer w0.254: PROG.3 75.942,117.094 76.831,116.205 77.085,115.951 77.085,114.427 77.593,113.919 78.482,113.03 328p.17
U7_19: 328p.19
U7_20: 328p.20
U7_22: 328p.22
U7_29: 10k.1@75.115,120.015 328p.29 PROG.5 | length 17.2
  Top Layer w0.254: 328p.29 73.046,107.29 v1(73.148,107.188) ; PROG.5 75.115,119.442 10k.1@75.115,120.015
  Bottom Layer w0.254: v1(73.148,107.188) 73.148,110.744 71.878,112.014 71.878,117.475 72.132,117.729 PROG.5
U7_30: 328p.30
U7_31: 328p.31
VCC180В: 4.7u.1 10k.2@113.407,106.426 330k.2 HER106.2 | length 28.5
  Bottom Layer w0.5: 10k.2@113.407,106.426 116.328,106.426 330k.2 118.868,113.792 122.932,117.856 122.932,121.602 HER106.2 129.407,121.666 4.7u.1
pads on no net: DISP1.12 DISP2.12 DISP3.12 DISP4.12

## Polygon pours and split planes (outlines as drawn)
GND on Bottom Layer (solid): 163.572,38.227 38.35,38.354 38.35,125.476 163.572,125.476
GND on Top Layer (solid): 163.572,125.476 38.35,125.476 38.35,38.354 163.572,38.354

## Silkscreen, mask and mechanical layers (free items; w line width, h text height)
Top Overlay:
  lines w0.5 net S$3081: 38.35,81.915 115.947,81.915 163.318,81.915
  lines w0.5 net S$3122: 93.849,125.095 93.849,115.824 112.01,115.697
  lines w0.5 net S$3124: 112.01,115.697 112.01,104.902 147.062,104.902 147.062,81.915
  lines w0.5 net S$3127: 93.849,125.095 163.318,125.095 163.318,81.915
  text "HIGH VOLTAGE" at 125.599,104.521 h2.03
Bottom Overlay:
  lines w0.5 net S$3223: 93.849,125.222 93.849,115.824 112.01,115.824 112.01,105.029 147.062,105.029
  lines w0.5 net S$3225: 147.062,82.042 147.062,105.029
  lines w0.5 net S$3228: 93.849,125.222 163.318,125.095 163.318,82.042 147.062,82.042
  text "HIGH VOLTAGE" at 146.554,104.521 h2.03

## Text inside footprints (layer, text, board x,y; h text height)
ARDUINO: Top Overlay "TX1" at 85.594,84.963 h1.02; Top Overlay "GND" at 63.496,87.757 h1.02; Top Overlay "5V" at 63.496,93.091 h1.02; Top Overlay "MISO/D12" at 85.621,120.651 h1.02 r3; Top Overlay "Vin" at 63.514,85.217 h1.02 r2; Top Overlay "D13/CLK" at 60.221,120.651 h1.02 r3; Top Overlay "GND" at 85.594,92.837 h1.02; Top Overlay "RX1" at 85.594,87.757 h1.02; Top Overlay "RST" at 85.594,90.297 h1.02; Top Overlay "D2" at 85.594,95.377 h1.02; Top Overlay "D3" at 85.594,97.917 h1.02; Top Overlay "D4" at 85.594,100.457 h1.02; Top Overlay "D5" at 85.594,102.743 h1.02; Top Overlay "D6" at 85.594,105.283 h1.02; Top Overlay "D7" at 85.594,108.077 h1.02; Top Overlay "D8" at 85.594,110.363 h1.02; Top Overlay "D9" at 85.594,112.903 h1.02; Top Overlay "CS/D10" at 85.502,115.698 h1.02 r4; Top Overlay "MOSI/D11" at 85.621,118.111 h1.02 r3; Top Overlay "3V3" at 63.496,118.491 h1.02; Top Overlay "REF" at 63.496,115.697 h1.02; Top Overlay "A0" at 63.496,113.411 h1.02; Top Overlay "A1" at 63.97,110.943 h1.02 r69; Top Overlay "A2" at 63.496,108.331 h1.02; Top Overlay "A3" at 63.496,105.537 h1.02; Top Overlay "A4/SDA" at 60.483,102.998 h1.02 r4; Top Overlay "A5/SCL" at 60.483,100.585 h1.02 r4; Top Overlay "A6" at 63.496,98.171 h1.02; Top Overlay "A7" at 63.496,95.377 h1.02; Top Overlay "RST" at 63.496,90.297 h1.02
DISP1: Top Overlay "1" at 51.05,67.818 h1.27 r180; Top Overlay "2" at 49.551,63.805 h1.27 r180; Top Overlay "3" at 49.551,58.826 h1.27 r180; Top Overlay "4" at 49.925,53.701 h1.27 r144; Top Overlay "5" at 51.533,48.819 h1.27 r180; Top Overlay "6" at 55.49,47.826 h1.27 r185; Top Overlay "7" at 63.815,47.769 h1.27 r155; Top Overlay "8" at 66.544,53.823 h1.27 r180; Top Overlay "9" at 66.489,58.824 h1.27 r185; Top Overlay "10" at 66.29,62.052 h1.27; Top Overlay "11" at 65.172,66.192 h1.27 r90; Top Overlay "12" at 60.296,68.809 h1.27
DISP2: Top Overlay "1" at 78.736,67.818 h1.27 r180; Top Overlay "2" at 77.237,63.805 h1.27 r180; Top Overlay "3" at 77.237,58.826 h1.27 r180; Top Overlay "4" at 77.611,53.701 h1.27 r144; Top Overlay "5" at 79.219,48.819 h1.27 r180; Top Overlay "6" at 83.176,47.826 h1.27 r185; Top Overlay "7" at 91.233,47.828 h1.27 r180; Top Overlay "8" at 94.23,53.823 h1.27 r180; Top Overlay "9" at 94.175,58.824 h1.27 r185; Top Overlay "10" at 93.976,62.052 h1.27; Top Overlay "11" at 92.858,66.192 h1.27 r90; Top Overlay "12" at 87.982,68.809 h1.27
DISP3: Top Overlay "1" at 109.47,68.013 h1.27 r180; Top Overlay "2" at 107.844,63.805 h1.27 r180; Top Overlay "3" at 107.844,58.826 h1.27 r180; Top Overlay "4" at 108.218,53.701 h1.27 r144; Top Overlay "5" at 109.826,48.819 h1.27 r180; Top Overlay "6" at 113.783,47.826 h1.27 r185; Top Overlay "7" at 122.108,47.769 h1.27 r155; Top Overlay "8" at 124.837,53.823 h1.27 r180; Top Overlay "9" at 124.782,58.824 h1.27 r185; Top Overlay "10" at 124.583,62.052 h1.27; Top Overlay "11" at 123.465,66.192 h1.27 r90; Top Overlay "12" at 118.589,68.809 h1.27
DISP4: Top Overlay "1" at 137.029,67.818 h1.27 r180; Top Overlay "2" at 135.53,63.805 h1.27 r180; Top Overlay "3" at 135.53,58.826 h1.27 r180; Top Overlay "4" at 135.904,53.701 h1.27 r144; Top Overlay "5" at 137.512,48.819 h1.27 r180; Top Overlay "6" at 141.469,47.826 h1.27 r185; Top Overlay "7" at 149.794,47.769 h1.27 r155; Top Overlay "8" at 152.523,53.823 h1.27 r180; Top Overlay "9" at 152.468,58.824 h1.27 r185; Top Overlay "10" at 152.269,62.052 h1.27; Top Overlay "11" at 151.151,66.192 h1.27 r90; Top Overlay "12" at 146.275,68.809 h1.27
PROG: Top Overlay "1" at 80.26,118.11 h0.76 r180; Top Overlay "2" at 80.26,115.443 h0.76 r180; Top Overlay "5" at 71.243,117.983 h0.76 r180; Top Overlay "6" at 71.21,115.569 h0.76 r185